# Altium PCB EMAX_12A_PCB.PcbDoc
Units mm, origin at the board's own origin, x right, y up, seen from the top; angles counter-clockwise.
Board outline 24.9 x 19.2 mm, 2 copper layers (Top Layer, Bottom Layer), stack 1.58 mm thick; 41 components, 28 nets, 149 pads, 29 vias.
Unrouted connection lines stored in the file: 20.
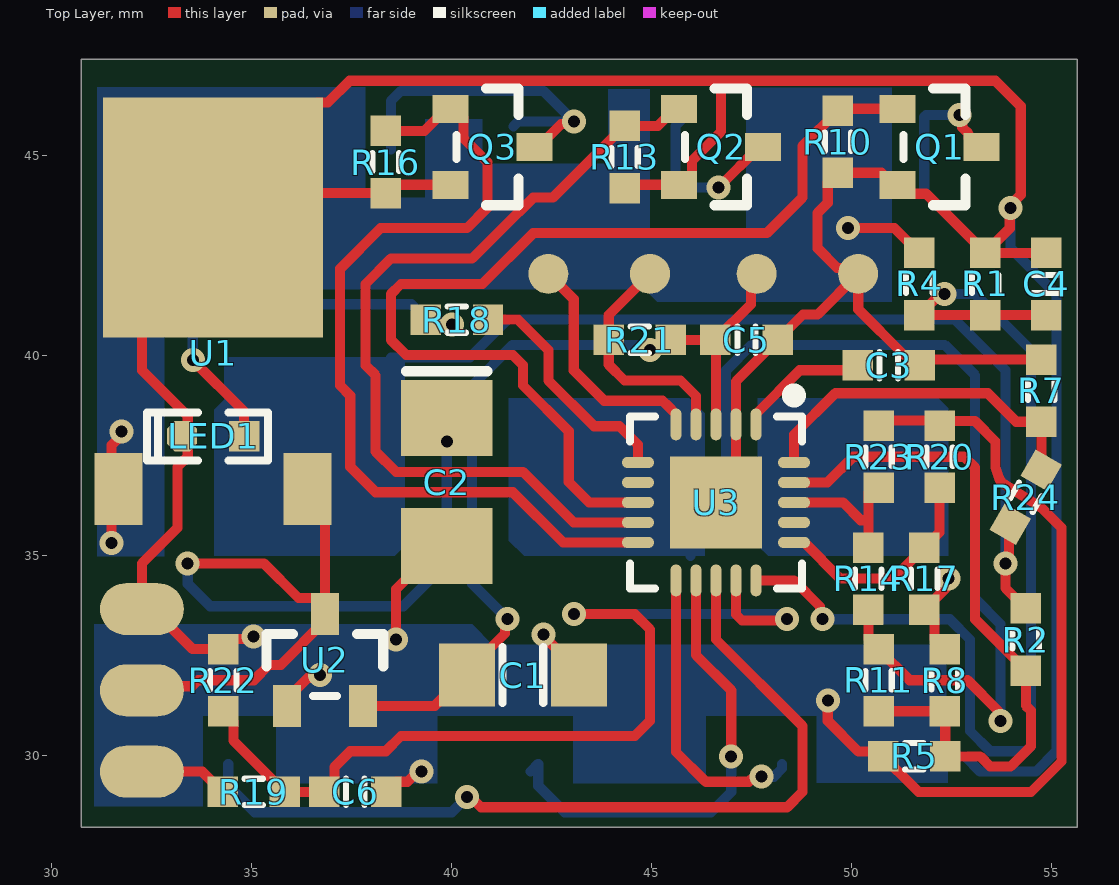
[diagram p0: Top Layer view]
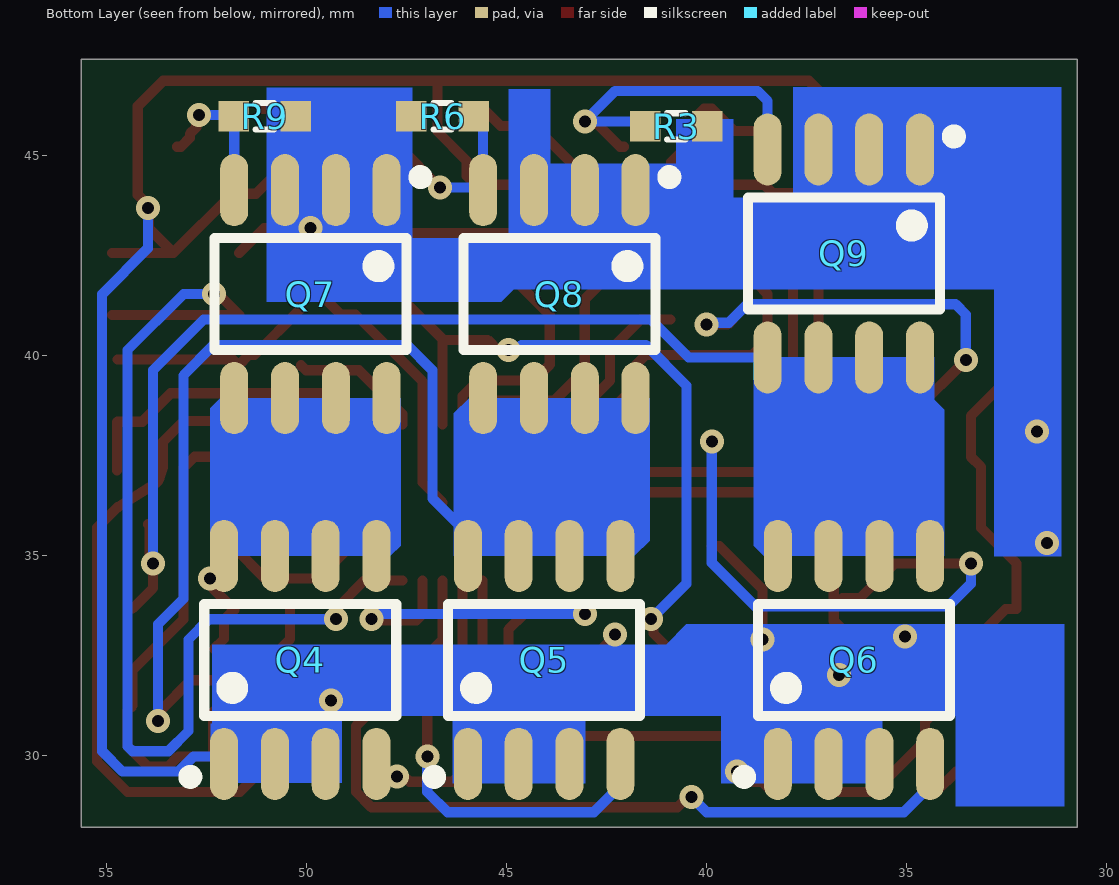
[diagram p1: Bottom Layer view, seen from below]
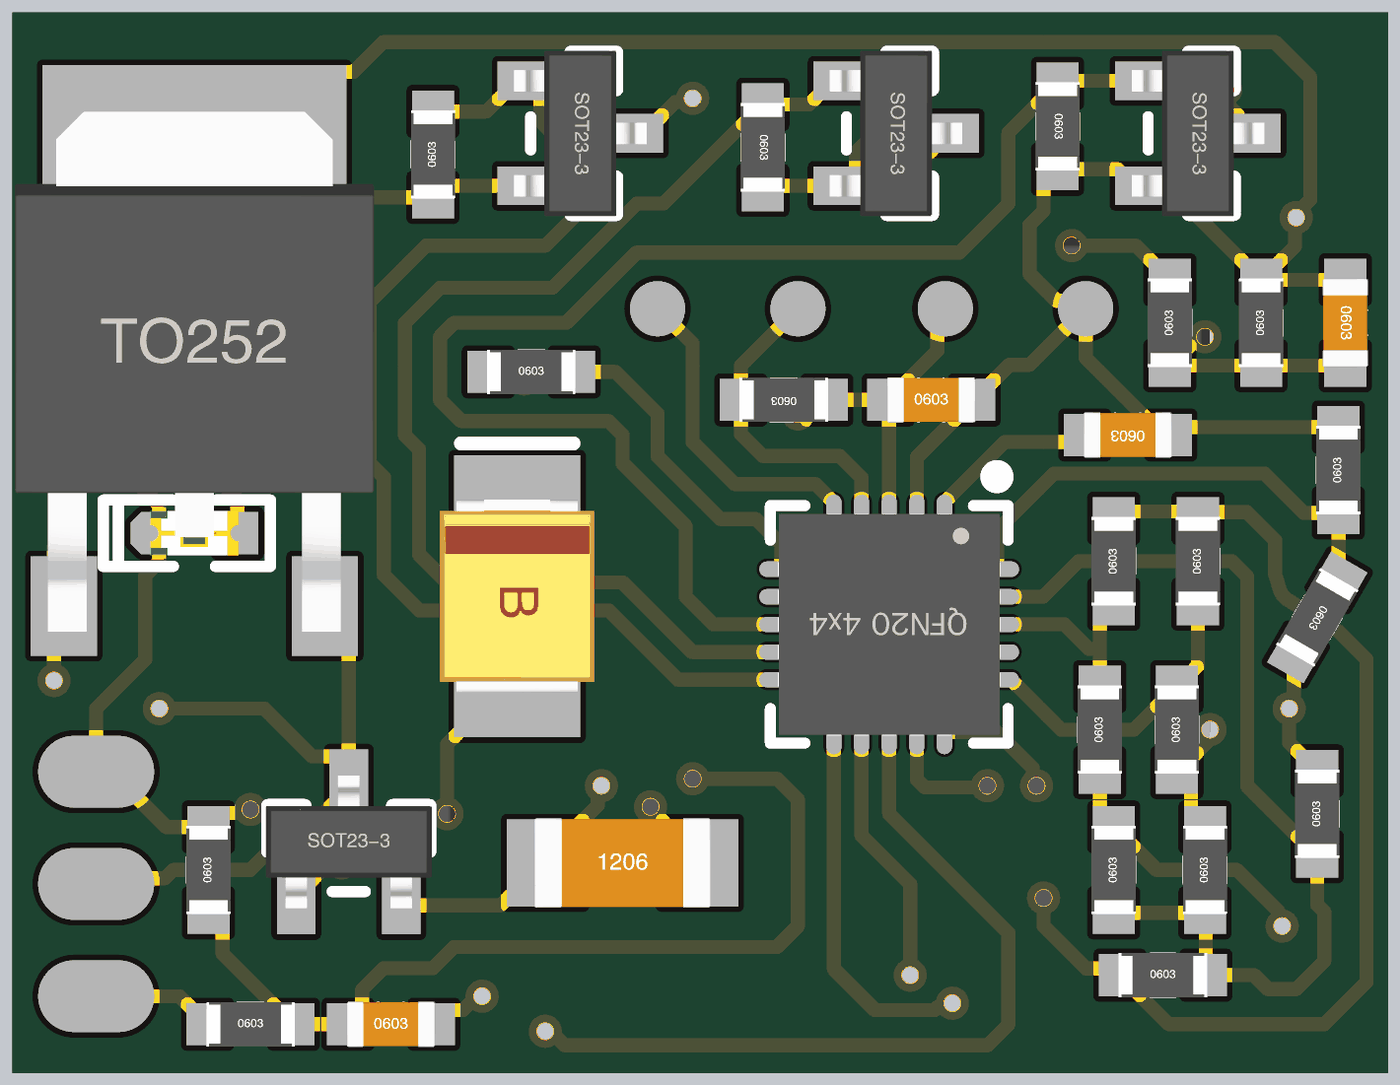
[diagram p2: 3D render of the assembled board from above, using the file's embedded part models]
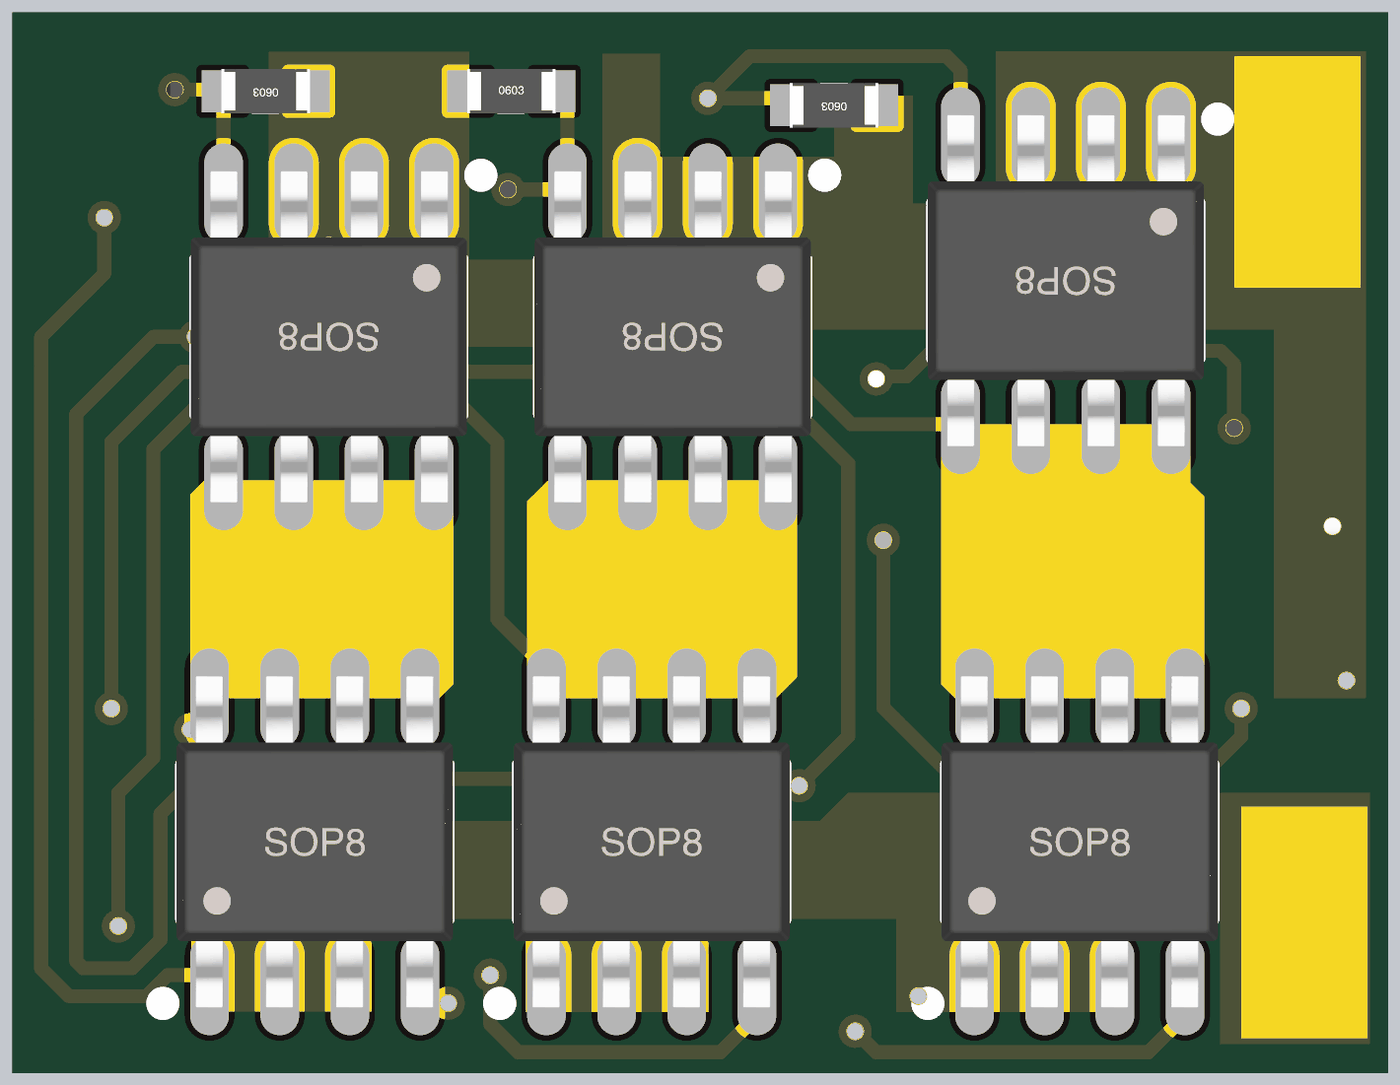
[diagram p3: 3D render of the assembled board from below, using the file's embedded part models]

## Layer stack, top to bottom
Top Solder: solder mask 0.0102, Solder Resist, Dk 3.5
Top Layer: signal copper 0.0356
Dielectric 1: dielectric 1.5086, FR-4, Dk 4.8
Bottom Layer: signal copper 0.0356
Bottom Solder: solder mask 0.0102, Solder Resist, Dk 3.5

## Board outline
30.74,28.2 55.64,28.2 55.64,47.4 30.74,47.4

## Design rules (kind name [scope] priority, off if disabled: settings)
Clearance KeepOut_Clearance [(InLayerClass('Signal Layers')) vs (OnLayer('Keep-Out Layer'))] p1: gap=0.2 ignorepadtopadclearanceinfootprint=FALSE
Clearance [All] p2: gap=0.178 ignorepadtopadclearanceinfootprint=TRUE
HoleToHoleClearance [All] p1: gap=0 allowstackedmicrovias=TRUE
MinimumSolderMaskSliver [All] p1: minsoldermaskwidth=0
PolygonConnect [All] p1: thpad.connectstyle=Relief thpad.reliefconductorwidth=0.254 thpad.reliefentries=4 thpad.polygonreliefangle="90 Angle" thpad.airgapwidth=0.254 smdpad.connectstyle=Relief smdpad.reliefconductorwidth=0.254 smdpad.reliefentries=4 smdpad.polygonreliefangle="90 Angle" smdpad.airgapwidth=0.254 via.connectstyle=Direct via.reliefconductorwidth=0.254 via.reliefentries=4 via.polygonreliefangle="90 Angle" via.airgapwidth=0.254
RoutingVias [All] p1: holewidth=0.3 width=0.45 viastyle="Through Hole" minholewidth=0.2 minwidth=0.4 maxholewidth=1 maxwidth=1.27
SilkToSolderMaskClearance [IsPad] p1: minsilkscreentomaskgap=0 clearancetoexposedcopper=TRUE
SolderMaskExpansion [All] p1: expansion=0.102 istentingtop=FALSE
UnRoutedNet [All] p1: checkbadconnections=TRUE
Width [All] p1: maxlimit=1.27 minlimit=0.127 preferedwidth=0.254
26 further rules are at their usual default settings.

## Components (designator, comment, footprint, x,y, rotation, side; value= is the part's Value field where it differs from the comment)
C1 "22uF" "C 1206_L" 41.783,32.004 r180 top
C2 "NC" "CD B(3528)" 39.878,36.83 r270 top
C3 "NC" "C 0603_L" 50.927,39.751 r0 top
C4 "NC" "C 0603_L" 54.864,41.783 r90 top
C5 "0.1uF" "C 0603_L" 47.371,40.386 r180 top
C6 "NC" "C 0603_L" 37.592,29.083 r180 top
LED1 "RED" "LED 0603R" 34.036,37.973 r180 top
Q1 "NMOS" LC-SOT-23(SOT-23-3)#1 52.197,45.212 r180 top
Q2 "NMOS" LC-SOT-23(SOT-23-3)#1 46.736,45.212 r180 top
Q3 "NMOS" LC-SOT-23(SOT-23-3)#1 41.021,45.212 r180 top
Q4 "NMOS" LC-SOP-8_150mil 50.165,32.385 r180 bottom
Q5 "NMOS" LC-SOP-8_150mil 44.069,32.385 r180 bottom
Q6 "NMOS" LC-SOP-8_150mil 36.322,32.385 r180 bottom
Q7 "PMOS" LC-SOP-8_150mil 49.911,41.529 r0 bottom
Q8 "PMOS" LC-SOP-8_150mil 43.688,41.529 r0 bottom
Q9 "PMOS" LC-SOP-8_150mil 36.576,42.545 r0 bottom
R1 "1K" "R 0603_L" 53.34,41.783 r90 top
R2 "5.1K" "R 0603_L" 54.356,32.893 r90 top
R3 "NC" "R 0603_L" 40.767,45.72 r0 bottom
R4 "10K" "R 0603_L" 51.689,41.783 r90 top
R5 "330R" "R 0603_L" 51.562,29.972 r0 top
R6 "NC" "R 0603_L" 46.609,45.974 r180 bottom
R7 "1K" "R 0603_L" 54.737,39.116 r90 top
R8 "5.1K" "R 0603_L" 52.324,31.877 r90 top
R9 "NC" "R 0603_L" 51.054,45.974 r0 bottom
R10 "10K" "R 0603_L" 49.657,45.339 r270 top
R11 "5.1K" "R 0603_L" 50.673,31.877 r90 top
R13 "10K" "R 0603_L" 44.323,44.958 r270 top
R14 "5.1K" "R 0603_L" 50.419,34.417 r90 top
R16 "10K" "R 0603_L" 38.354,44.831 r90 top
R17 "5.1K" "R 0603_L" 51.816,34.417 r90 top
R18 "2K" "R 0603_L" 40.132,40.894 r0 top
R19 "1K" "R 0603_L" 35.052,29.083 r0 top
R20 "1K" "R 0603_L" 52.197,37.465 r90 top
R21 "2K" "R 0603_L" 44.704,40.386 r180 top
R22 "5.1K" "R 0603_L" 34.29,31.877 r90 top
R23 "1K" "R 0603_L" 50.673,37.465 r90 top
R24 "5.1K" "R 0603_L" 54.356,36.449 r240 top
U1 "78M05" LC-TO-252-2 34.036,36.449 r270 top
U2 "XC6206P332MR" LC-SOT-23(SOT-23-3)#2 36.83,32.385 r270 top
U3 "C8051F330" LC-QFN-20_4x4x05P 46.609,36.322 r180 top

## Footprints (in the part's own frame and the unit in brackets; to place one, negate y for a bottom-side part, rotate by r counter-clockwise, add the part's x,y. Pads: shape width x height; smd on the part's side, far side on the other; paste and mask are expansions set on the pad)
"C 0603_L" [mil] "无极性贴片电容"
  rect 30x30 smd: 1(-30.59,0) 2(30.59,0)
  silkscreen extent -9,-13 9,13, body extent -31,-16 31,16, height 32
"C 1206_L" [mil] "无极性贴片电容"
  rect 55x62 smd: 1(-55.12,0) 2(55.11,0)
  silkscreen extent -20,-28 20,27, body extent -63,-32 63,32, height 48
"CD B(3528)" [mm] "长3.5mm，宽2.8mm，厚1.9mm"
  rect 1.905x2.286 smd: 1(-1.6,0) 2(1.6,0)
  silkscreen extent -2.77,-1.02 -2.77,1.02, body extent -1.75,-1.4 1.75,1.4, height 1.9
LC-QFN-20_4x4x05P [mm]
  oval 0.28x0.8 smd mask+0.051: 1(-1,-1.95) 2(-0.5,-1.95) 3(0,-1.95) 4(0.5,-1.95) 5(1,-1.95) 11(1,1.95) 12(0.5,1.95) 13(0,1.95) 14(-0.5,1.95) 15(-1,1.95)
  rect 2.3x2.3 smd mask+0.051: 2(0,0)
  oval 0.8x0.28 smd mask+0.051: 6(1.95,-1) 7(1.95,-0.5) 8(1.95,0) 9(1.95,0.5) 10(1.95,1) 16(-1.95,1) 17(-1.95,0.5) 18(-1.95,0) 19(-1.95,-0.5) 20(-1.95,-1)
  silkscreen extent -2.15,-2.82 2.15,2.15, body extent -2.01,-2.01 2.01,2.01, height 0.95
LC-SOP-8_150mil [mm]
  oval 0.7x1.8 smd: 1(-1.905,-2.6) 2(-0.635,-2.6) 3(0.635,-2.6) 4(1.905,-2.6) 5(1.905,2.6) 6(0.635,2.6) 7(-0.635,2.6) 8(-1.905,2.6)
  silkscreen extent -2.9,-3.07 2.4,1.4, body extent -2.5,-3 2.5,3, height 1.9
LC-SOT-23(SOT-23-3)#1 [mm]
  rect 0.9x0.7 smd: 1(1.05,-0.95) 2(1.05,0.95) 3(-1.05,0)
  silkscreen extent -0.65,-1.46 0.9,1.46, body extent -1.2,-1.5 1.2,1.5, height 1.05
LC-SOT-23(SOT-23-3)#2 [mm]
  rect 1.05x0.7 smd: 1(1.15,-0.95) 2(1.15,0.95) 3(-1.15,0)
  silkscreen extent -0.65,-1.46 0.9,1.46, body extent -1.2,-1.5 1.2,1.5, height 1.05
LC-TO-252-2 [mm]
  rect 1.8x1.2 smd: 1(-0.204,-2.361) 3(-0.204,2.361)
  rect 6x5.5 smd: 2(-7,0)
  body extent -9.16,-3.25 0.26,3.25, height 2.3
"LED 0603R" [mil] "红色0603LED"
  rect 30x30 smd: 1(-30.59,0)
  oct 30x30 smd: 2(30.59,0)
  silkscreen extent -54,-24 65,24, body extent -31,-16 32,16, height 24
"R 0603_L" [mil] "1/10W贴片电阻"
  rect 30x30 smd: 1(-30.59,0) 2(30.59,0)
  silkscreen extent -9,-13 9,13, body extent -31,-16 31,16, height 16

## Part data
C1 C3 C4 C5 C6: library part C, "无极性贴片电容", BOM名称=无极性贴片电容, 学习资源=www.ooocke.com, 材质=X7R, 版权归属=源创客
C2: library part C-CD, "贴片钽电容", BOM名称=贴片钽电容, 学习资源=www.ooocke.com, 版权归属=源创客
LED1: library part LED-SMD, "贴片LED", BOM名称=贴片LED, 学习资源=www.ooocke.com, 版权归属=源创客
Q1 Q2 Q3: library part 8050-SMD, "高频放大-NPN型", BOM名称=高频放大-NPN型, 学习资源=www.ooocke.com, 属性="40V 1.5A 1W 100MHZ", 版权归属=源创客
Q4 Q5 Q6: library part NMOS_DFN8_5x6, BOM名称=效应管, 学习资源=www.ooocke.com, 描述="N沟场 100V/22A", 版权归属=源创客
Q7 Q8 Q9: library part PMOS_DFN8_5x6, BOM名称=效应管, 学习资源=www.ooocke.com, 描述="N沟场 100V/22A", 版权归属=源创客
R1 R2 R3 R4 R5 R6 R7 R8 R9 R10 R11 R13 R14 R16 R17 R18 R19 R20 R21 R22 R23 R24: library part R, "贴片电阻", BOM名称=贴片电阻, 学习资源=www.ooocke.com, 版权归属=源创客
U1: library part 78xx, "线性稳压芯片", BOM名称=线性稳压芯片, 学习资源=www.ooocke.com, 版权归属=源创客
U2: "低压差线性稳压芯片", BOM名称=低压差线性稳压芯片, 学习资源=www.ooocke.com, 版权归属=源创客

## Free pads (board coordinates)
  oval 2.1x1.3 smd: pad(32.258,29.591) pad(32.258,31.623) pad(32.258,33.655)
  round 1 smd: pad(42.418,42.037) pad(44.958,42.037) pad(47.625,42.037) pad(50.165,42.037)

## Via types
v1: diameter 0.6, hole 0.3, Top Layer to Bottom Layer, tented both sides, 29 vias

## Nets (pads, with @x,y where several pads share a name; then routed paths per layer and width w, separated by ;. In a path a pad name is that pad's centre, name@x,y a point inside that pad or via, vN(x,y) a via of type N, cw(c..) or ccw(c..) an arc to the next point about the centre after c; other vN are vias at no path point)
+3.3V: C1.2 C5.2 pad.pad@47.625,42.037 R21.1 U2.2 U3.3 | length 21.9
  Top Layer w0.254: U2.2 39.576,31.235 40.383,32.042 C1.2@40.383,32.22 ; C1.2@40.383,32.093 41.336,33.046 41.336,33.335 v1(41.402,33.401) ; v1(44.958,40.132) 45.227,40.132 R21.1 C5.2 ; U3.3 46.609,40.371 C5.2 ; pad.pad@47.625,42.037 47.482,41.894 47.482,41.274 C5.2
  Bottom Layer w0.254: v1(41.402,33.401) 40.513,34.29 40.513,39.243 41.529,40.259 44.636,40.259 44.697,40.198 44.892,40.198 v1(44.958,40.132)
+5V: C2.1 pad.pad@32.258,31.623 U1.3 U2.3 | length 23.3
  Top Layer w0.254: pad.pad@32.258,31.623 32.362,31.727 33.505,31.727 33.655,31.877 35.052,31.877 35.433,32.258 35.728,32.258 36.83,33.36 U2.3@36.83,33.71 ; v1(33.401,34.798) 35.306,34.798 36.171,33.933 36.607,33.933 U2.3@36.83,33.71 ; U1.3 36.83,36.22 U2.3@36.83,33.71
  Bottom Layer w0.254: v1(33.401,34.798) 33.401,34.29 33.965,33.726 38.791,33.726 39.878,34.814 v1(39.878,37.846)
AL: Q6.4 U3.13 | length 21.8
  Top Layer w0.254: v1(40.386,28.956) 40.48,28.956 40.734,28.702 48.387,28.702 48.768,29.083 48.768,30.734 46.609,32.893 U3.13
  Bottom Layer w0.254: Q6.4 34.417,29.235 35.077,28.575 40.005,28.575 v1(40.386,28.956)
BL: Q5.4 U3.12 | length 11.8
  Top Layer w0.254: U3.12 46.109,32.504 46.99,31.623 v1(46.99,29.972)
  Bottom Layer w0.254: Q5.4@41.97,29.591 Q5.4 42.164,29.235 42.824,28.575 46.482,28.575 46.99,29.083 v1(46.99,29.972)
CL: Q4.4 U3.11 | length 7.5
  Top Layer w0.254: U3.11 45.609,30.083 46.355,29.337 47.43,29.337 47.491,29.398 47.686,29.398 v1(47.752,29.464)
  Bottom Layer w0.254: v1(47.752,29.464) 48.054,29.464 48.26,29.67 Q4.4
GND: C1.1 C2.2 C3.2 C4.2 C5.1 C6.1 LED1.2 pad.pad@32.258,33.655 pad.pad@50.165,42.037 Q1.2 Q2.2 Q3.2 Q4.1 Q4.2 Q4.3 Q5.1 Q5.2 Q5.3 Q6.1 Q6.2 Q6.3 R1.2 R5.1 R7.2 R10.2 R13.2 R16.1 R20.2 R22.2 R23.2 U1.2 U2.1 U3.2 | length 121.8
  Top Layer w0.254: v1(35.052,32.971) 34.989,32.908 34.544,32.908 R22.2 33.528,32.654 32.527,33.655 32.258,33.655 32.258,34.798 33.147,35.687 33.147,37.211 33.401,37.465 33.401,38.481 32.258,39.624 32.258,41.671 U1.2 ; U2.1 35.88,31.41 36.408,31.938 36.637,31.938 v1(36.703,32.004) ; C6.1 38.623,29.337 38.895,29.337 39.149,29.591 v1(39.243,29.591) ; v1(38.608,32.893) 38.608,34.151 39.687,35.23 C2.2 ; Q3.2 38.562,44.262 R16.1 34.641,44.054 U1.2 ; v1(42.291,33.02) 42.291,32.985 43.183,32.093 C1.1 ; R13.2 44.404,44.262 Q2.2 45.786,44.262 46.009,44.485 46.009,44.866 46.736,45.593 46.736,46.863 ; U3.2@46.609,36.322 47.109,36.822 47.109,38.272 47.109,39.347 48.783,41.021 49.149,41.021 pad.pad@50.165,42.037 ; v1(49.403,31.369) 49.403,30.861 50.172,30.092 50.665,30.092 51.674,29.083 54.483,29.083 55.245,29.845 55.245,35.689 54.746,36.189 ; R23.2@50.673,38.369 R20.2@52.197,38.369 ; R20.2@52.197,38.354 53.086,38.354 53.594,37.846 53.594,37.217 53.693,36.917 ccw(c53.934,36.997) 53.798,36.782 54.728,36.201 ; 54.728,36.201 cw(c54.593,35.985) 54.745,36.189 ; R7.2 51.846,39.893 C3.2 51.45,40.005 51.308,40.005 50.165,41.148 pad.pad@50.165,42.037 ; C4.2 R1.2 ; U1.2 34.036,43.699 36.659,46.322 36.909,46.322 37.45,46.863 46.736,46.863 ; 46.736,46.863 53.594,46.863 54.229,46.228 54.229,44.01 53.975,43.756 v1(53.975,43.688) 53.953,43.666 53.953,43.173 R1.2 ; pad.pad@50.165,42.037 50.022,42.18 49.641,42.18 49.149,42.672 49.149,43.561 49.403,43.815 49.403,44.308 R10.2 50.747,44.562 51.27,44.039 51.861,44.039 R1.2
  Bottom Layer w0.254: v1(42.291,33.02) 42.337,32.974 42.337,32.339 43.434,31.242 Q5.3 ; Q4.1 52.257,29.972 52.832,29.972 53.213,29.591 54.61,29.591 55.118,30.099 55.118,41.529 53.975,42.672 v1(53.975,43.688)
NetC3_1: C3.1 U3.1 | length 3.3
  Top Layer w0.254: U3.1 47.609,38.532 48.701,39.624 50.023,39.624 C3.1
NetLED1_1: LED1.1 R18.1 | length 11.1
  Top Layer w0.254: v1(33.528,39.878) 34.813,38.593 LED1.1 ; R18.1 39.482,40.767 v1(40.005,40.767)
  Bottom Layer w0.254: v1(33.528,39.878) 33.528,41.021 33.782,41.275 38.989,41.275 39.451,40.813 39.959,40.813 v1(40.005,40.767)
NetQ1_3: Q1.3 Q7.4 R9.2 | length 3.8
  Top Layer w0.254: v1(52.698,46.004) 52.765,45.937 52.765,45.694 52.924,45.535 52.924,45.435 53.147,45.212 Q1.3
  Bottom Layer w0.254: Q7.4 51.816,45.959 51.861,46.004 v1(52.698,46.004)
NetQ2_3: Q2.3 Q8.4 R6.2 | length 4.6
  Top Layer w0.254: v1(46.67,44.196) 47.686,45.212 Q2.3
  Bottom Layer w0.254: R6.2 45.593,45.735 Q8.4 45.66,44.196 v1(46.67,44.196)
NetQ3_3: Q3.3 Q9.4 R3.2 | length 9
  Top Layer w0.254: Q3.3 42.171,45.212 42.74,45.781 42.987,45.781 v1(43.053,45.847)
  Bottom Layer w0.254: Q9.4 38.481,46.355 38.735,46.609 42.291,46.609 v1(43.053,45.847) 41.671,45.847 R3.2
NetR18_2: R18.2 U3.6 | length 5.9
  Top Layer w0.254: R18.2 41.656,40.894 42.418,40.132 42.418,39.37 43.561,38.227 44.196,38.227 44.659,37.764 U3.6
NetR21_2: pad.pad@44.958,42.037 R21.2 U3.4 | length 5.9
  Top Layer w0.254: pad.pad@44.958,42.037 43.927,41.006 R21.2 43.927,39.766 44.323,39.37 45.72,39.37 46.109,38.981 U3.4
OUTA: Q6.5 Q6.6 Q6.7 Q6.8 Q9.5 Q9.6 Q9.7 Q9.8 R2.2 R24.2 | length 23.5
  Top Layer w0.254: R24.2 53.933,35.742 53.933,34.977 53.848,34.892 53.848,34.178 R2.2
  Bottom Layer w0.254: Q9.5 40.453,39.945 41.402,40.894 52.578,40.894 53.848,39.624 v1(53.848,34.798)
OUTB: Q5.5 Q5.6 Q5.7 Q5.8 Q8.5 Q8.6 Q8.7 Q8.8 R11.2 R14.1 | length 25.7
  Top Layer w0.254: R14.1 50.419,32.908 R11.2 51.45,31.877 52.899,31.877 53.655,31.121 53.655,30.927 v1(53.721,30.861)
  Bottom Layer w0.254: Q5.8 45.974,35.535 46.863,36.424 46.863,39.624 47.498,40.259 52.324,40.259 53.086,39.497 53.086,33.909 53.721,33.274 v1(53.721,30.861)
OUTC: Q4.5 Q4.6 Q4.7 Q4.8 Q7.5 Q7.6 Q7.7 Q7.8 R8.2 R17.1 | length 2.2
  Top Layer w0.254: R8.2 52.07,32.908 52.07,33.386 R17.1 52.35,34.174 52.35,34.351 v1(52.416,34.417)
P0.1: R7.1 R24.1 U3.20 | length 8.8
  Top Layer w0.254: U3.20 48.559,38.018 49.593,39.052 53.404,39.052 54.117,38.339 R7.1 54.745,38.331 R24.1
P0.2: R2.1 R5.2 R8.1 R11.1 U3.19 | length 17.7
  Top Layer w0.254: U3.19 49.395,36.822 50.038,37.465 52.81,37.465 53.086,37.189 53.086,33.401 54.356,32.131 R2.1 54.356,31.242 54.483,31.115 54.483,30.226 53.975,29.718 53.467,29.718 53.213,29.972 R5.2 52.339,31.085 R8.1 R11.1
P0.3: R14.2 R23.1 U3.18 | length 3.8
  Top Layer w0.254: U3.18 49.784,36.322 50.228,35.877 50.419,35.877 ; R14.2 50.419,35.877 ; R23.1@50.673,36.815 50.419,36.561 50.419,35.877
P0.5: R17.2 R20.1 U3.16 | length 5.7
  Top Layer w0.254: U3.16 48.812,35.322 49.717,34.417 51.039,34.417 R17.2 52.197,35.575 R20.1@52.197,36.815
P0.6: C4.1 R1.1 R4.1 U3.15 | length 26.9
  Top Layer w0.254: U3.15 48.559,34.372 49.21,33.721 49.21,33.467 v1(49.276,33.401) ; v1(52.324,41.529) 52.258,41.463 52.146,41.463 R4.1 R1.1 C4.1
  Bottom Layer w0.254: v1(49.276,33.401) 52.451,33.401 52.959,32.893 52.959,30.607 53.467,30.099 54.356,30.099 54.483,30.226 54.483,40.132 53.086,41.529 v1(52.324,41.529)
P0.7: C6.2 R19.2 R22.1 U3.14 | length 24.7
  Top Layer w0.254: R22.1 34.544,30.846 34.544,30.368 R19.2 C6.2 37.069,29.337 37.069,29.703 37.465,30.099 38.354,30.099 38.735,30.48 44.577,30.48 44.958,30.861 44.958,33.147 44.577,33.528 v1(43.053,33.528) ; U3.14 47.109,33.52 47.258,33.371 48.357,33.371 v1(48.387,33.401)
  Bottom Layer w0.254: v1(43.053,33.528) 48.166,33.528 48.293,33.401 v1(48.387,33.401)
P1.3: Q3.1 R16.2 U3.10 | length 22.1
  Top Layer w0.254: R16.2 39.317,45.608 39.871,46.162 Q3.1 40.071,46.162 40.294,45.939 40.294,45.431 40.894,44.831 40.894,43.688 40.386,43.18 38.227,43.18 37.211,42.164 37.211,39.243 37.465,38.989 37.465,37.211 38.1,36.576 41.529,36.576 42.783,35.322 U3.10
P1.4: Q2.1 R13.1 U3.9 | length 21.2
  Top Layer w0.254: U3.9 43.045,35.822 41.783,37.084 38.608,37.084 38.1,37.592 38.1,39.497 37.846,39.751 37.846,41.783 38.481,42.418 40.513,42.418 41.275,43.18 42.037,43.942 42.53,43.942 R13.1 45.159,45.735 45.586,46.162 Q2.1
P1.5: Q1.1 R10.1 U3.8 | length 25.4
  Top Layer w0.254: U3.8 43.434,36.322 42.926,36.83 42.926,38.1 41.783,39.243 41.783,39.751 41.529,40.005 38.862,40.005 38.481,40.386 38.481,41.529 38.735,41.783 40.767,41.783 42.037,43.053 47.879,43.053 48.768,43.942 48.768,45.227 R10.1 49.703,46.162 Q1.1
P2.0: pad.pad@42.418,42.037 U3.5 | length 5.9
  Top Layer w0.254: pad.pad@42.418,42.037 43.053,41.402 43.053,39.624 43.815,38.862 45.272,38.862 45.399,38.735 45.609,38.525 U3.5
signal_in: pad.pad@32.258,29.591 R19.1 | length 2.2
  Top Layer w0.254: pad.pad@32.258,29.591 33.767,29.591 R19.1
VCC: Q7.1 Q7.2 Q7.3 Q8.1 Q8.2 Q8.3 Q9.1 Q9.2 Q9.3 R3.1 R4.2 R6.1 R9.1 U1.1 | length 4.9
  Top Layer w0.254: v1(31.496,35.306) 31.496,37.752 31.75,38.006 v1(31.75,38.1) ; v1(49.911,43.18) 51.069,43.18 R4.2
pads on no net: U3.7 U3.17

## Other copper
Bottom Layer:
  region net OUTA: 34.067,34.985 38.577,34.985 38.831,35.239 38.831,39.945 34.321,39.945 34.321,38.893 34.067,38.639
  region net OUTB: 41.433,35.366 41.814,34.985 46.324,34.985 46.324,38.548 45.943,38.929 41.433,38.929
  region net OUTC: 47.656,35.239 47.91,34.985 52.42,34.985 52.42,38.675 52.166,38.929 47.656,38.929
  region net GND: 31.07,28.723 33.782,28.723 33.782,30.988 35.619,30.988 35.619,29.3 39.64,29.3 39.64,30.988 43.041,30.988 43.041,29.3 46.355,29.3 46.355,30.988 46.74,30.988 49.133,30.988 49.133,29.313 52.399,29.313 52.399,30.792 52.366,30.792 52.366,32.766 46.74,32.766 41.021,32.766 40.513,33.274 31.07,33.274
  region net VCC: 31.14,34.982 32.815,34.982 32.815,41.656 44.828,41.656 45.142,41.343 51,41.343 51,46.691 47.37,46.691 47.37,42.926 44.958,42.926 44.958,46.656 43.916,46.656 43.916,44.794 40.767,44.794 40.767,45.9 39.34,45.9 39.34,43.942 37.846,43.942 37.846,46.7 31.14,46.7

## Silkscreen, mask and mechanical layers (free items; w line width, h text height)
Bottom Solder:
  rectangle: 31.242,42.418 33.528,46.609
  rectangle: 31.115,28.829 33.401,33.02
  region: 47.656,35.239 47.91,34.985 52.42,34.985 52.42,38.675 52.166,38.929 47.656,38.929
  region: 41.433,35.366 41.814,34.985 46.324,34.985 46.324,38.548 45.943,38.929 41.433,38.929
  region: 34.067,34.985 38.577,34.985 38.831,35.239 38.831,39.945 34.321,39.945 34.321,38.893 34.067,38.639
Mechanical 1:
  the board outline again, w0.013
Mechanical 2:
  drawing of 153 lines, arcs and shapes, not listed
Mechanical 3:
  circle w0.013: c41.976,34.101 r0.264
  circle w0.013: c36.74,32 r0.283
  circle w0.013: c38.602,32.8 r0.311
  circle w0.013: c42.24,33 r0.276
  circle w0.013: c43.14,34.179 r0.268
  circle w0.013: c46.64,44.2 r0.283
  circle w0.013: c49.84,43.1 r0.283
  circle w0.013: c54.062,43.691 r0.286
  circle w0.013: c43.14,45.773 r0.342
  circle w0.013: c40.079,40.789 r0.289
  circle w0.013: c52.154,41.463 r0.368
  circle w0.013: c44.927,40.008 r0.26
  circle w0.013: c49.436,31.411 r0.232
  circle w0.013: c52.14,34.325 r0.236
  circle w0.013: c49.34,33.9 r0.283
  circle w0.013: c48.34,33.7 r0.224
  circle w0.013: c53.653,30.8 r0.274
  circle w0.013: c47.04,30 r0.283
  circle w0.013: c47.74,29.5 r0.283
  circle w0.013: c53.79,34.8 r0.25
  circle w0.013: c41.29,29.6 r0.292
  circle w0.013: c39.24,29.6 r0.283
  circle w0.013: c40.388,28.948 r0.257
  circle w0.013: c31.74,38.1 r0.361
  circle w0.013: c33.54,34.95 r0.207
  circle w0.013: c33.54,39.9 r0.223
  circle w0.013: c52.74,46 r0.283
  circle w0.013: c52.74,46 r0.283
  circle w0.013: c52.154,41.463 r0.368
  circle w0.013: c52.14,34.325 r0.236
  circle w0.013: c41.29,29.6 r0.292
  circle w0.013: c44.927,40.008 r0.26
  circle w0.013: c41.976,34.101 r0.264
  circle w0.013: c38.602,32.8 r0.311
  circle w0.013: c33.54,39.9 r0.223
  circle w0.013: c36.74,32 r0.283
  circle w0.013: c33.54,34.95 r0.207
  circle w0.013: c34.94,33.5 r0.283
  circle w0.013: c43.14,34.179 r0.268
  circle w0.013: c49.84,43.1 r0.283
  circle w0.013: c53.79,34.8 r0.25
  circle w0.013: c49.436,31.411 r0.232
  circle w0.013: c53.653,30.8 r0.274
  circle w0.013: c49.34,33.9 r0.283
  circle w0.013: c48.34,33.7 r0.224
  circle w0.013: c40.388,28.948 r0.257
  circle w0.013: c47.04,30 r0.283
  circle w0.013: c47.74,29.5 r0.283
  circle w0.013: c42.24,33 r0.276
  circle w0.013: c39.24,29.6 r0.283
  circle w0.013: c54.062,43.691 r0.286
  circle w0.013: c43.14,45.773 r0.342
  circle w0.013: c31.74,38.1 r0.361
  circle w0.013: c46.64,44.2 r0.283
  circle w0.013: c31.44,35.3 r0.361
  circle w0.013: c40.079,40.789 r0.289
  circle w0.013: c39.915,37.7 r0.267
  lines w0.013: 51.74,44.7 51.74,44.894 ; 30.74,28.2 55.64,28.2 ; 30.74,28.2 30.74,47.4 ; 30.74,28.2 30.74,47.4 ; 30.74,28.2 55.64,28.2 ; 30.74,28.2 55.64,28.2 ; 30.74,28.2 30.74,47.4 ; 30.74,47.4 55.64,47.4 ; 30.74,47.4 55.64,47.4 ; 30.74,47.4 55.64,47.4 ; 55.64,28.2 55.64,47.4 ; 55.64,28.2 55.64,47.4 ; 55.64,28.2 55.64,47.4 ; 31.07,28.723 33.93,28.723 33.93,30.686 35.619,30.686 35.619,29.3 39.64,29.3 39.64,30.7 41.035,30.7 43.041,30.7 43.041,29.3 46.44,29.3 46.44,30.7 46.74,30.7 46.74,30.792 49.133,30.792 49.133,29.313 52.399,29.313 52.399,30.792 52.366,30.792 52.366,33 46.74,33 46.74,33.402 41.035,33.402 40.654,33.783 33.93,33.783 31.07,33.783 31.07,28.723 ; 31.14,34.982 32.815,34.982 32.815,41.6 38.084,41.6 39.34,41.6 41.14,41.6 44.884,41.6 45.142,41.343 51,41.343 51,43.43 51,46.691 47.37,46.691 47.37,43.43 45.124,43.43 45.124,46.656 43.916,46.656 43.916,44.794 41.14,44.794 41.14,45.9 39.34,45.9 39.34,44.42 38.084,44.42 38.084,46.7 32.815,46.7 31.14,46.7 31.14,34.982